# Altium PCB PCB2.PcbDoc
Units mm, origin at the board's own origin, x right, y up, seen from the top; angles counter-clockwise.
Board outline 35.51 x 41.3 mm, 2 copper layers (Top Layer, Bottom Layer); 16 components, 12 nets, 36 pads, 0 vias.
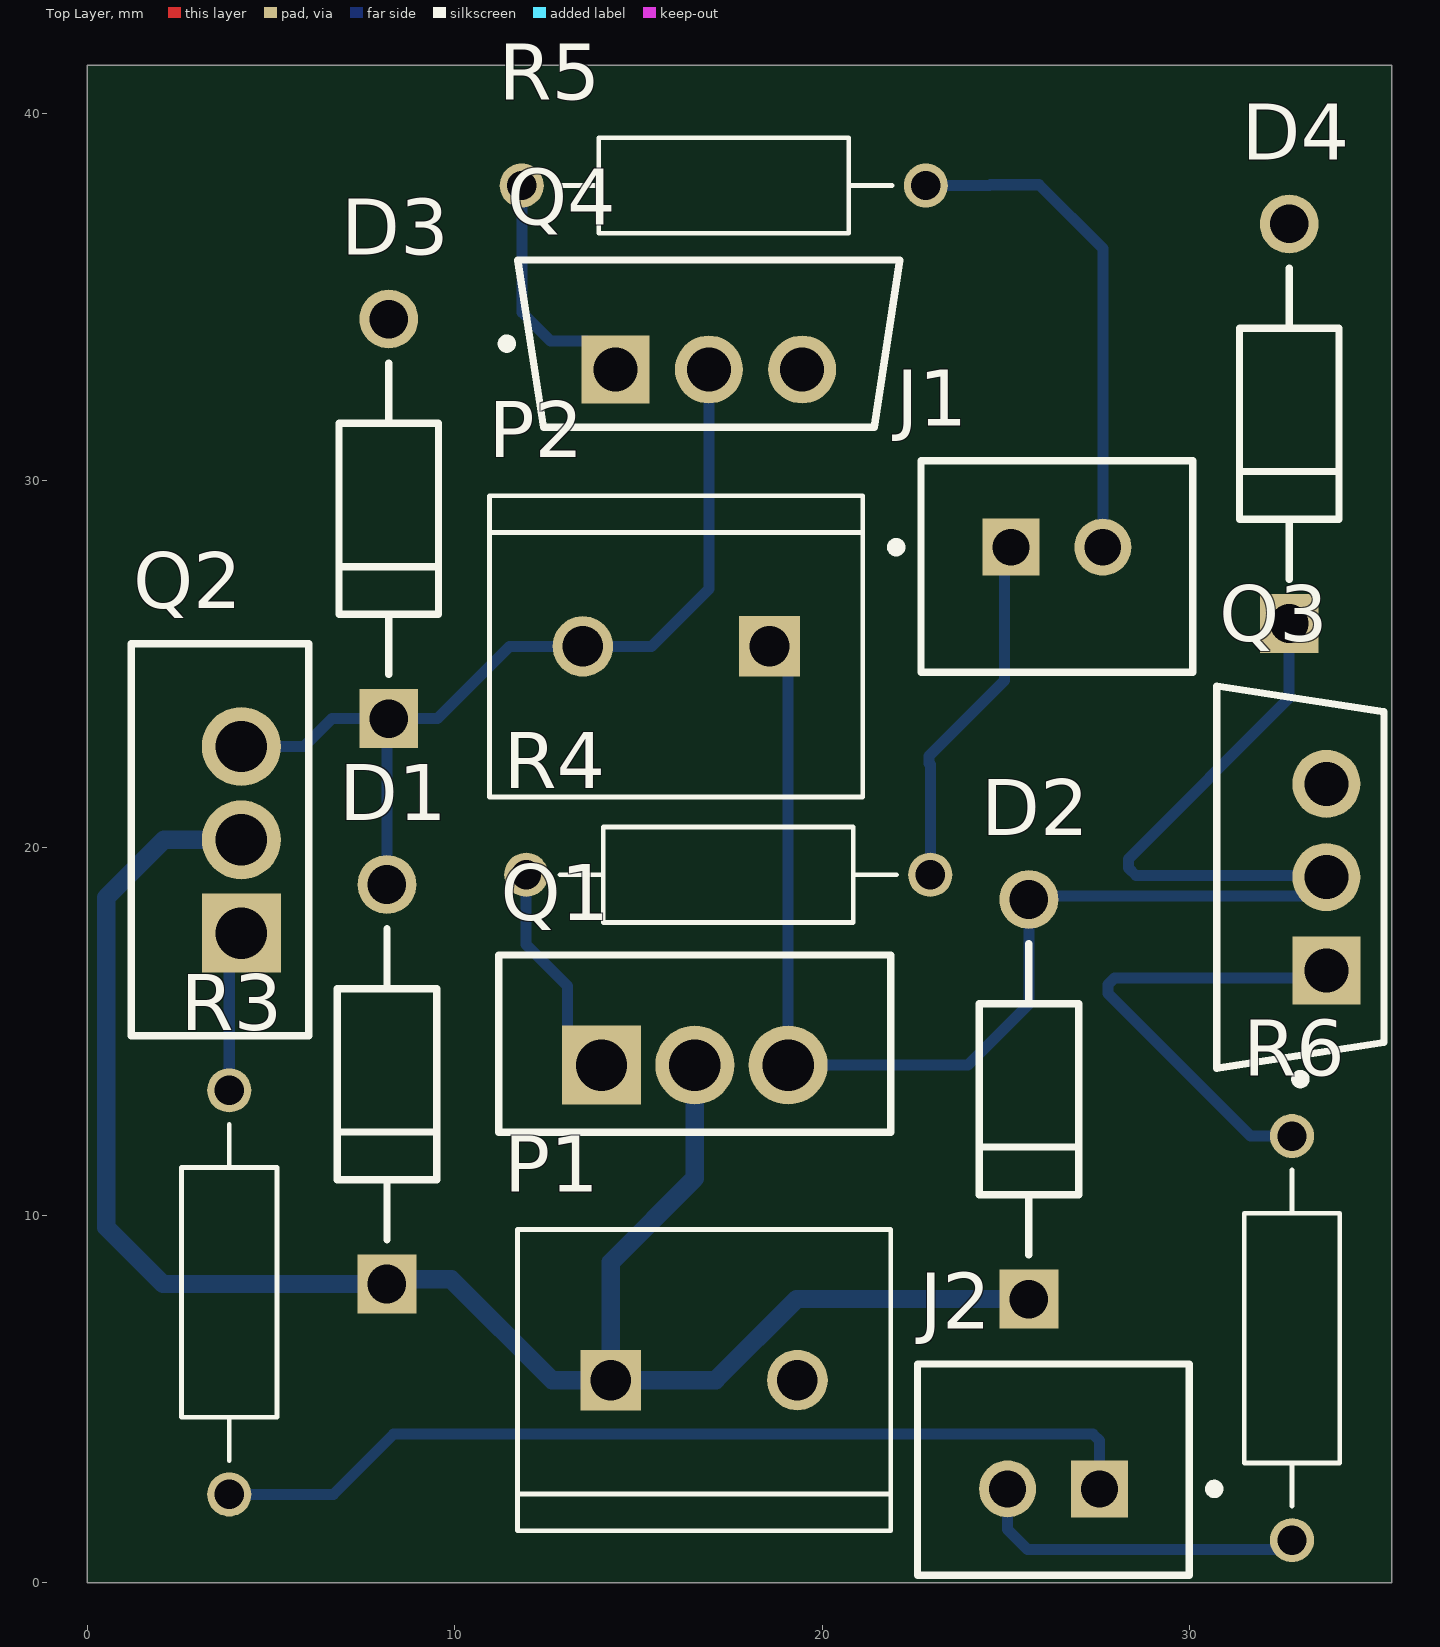
[diagram p0: Top Layer view]
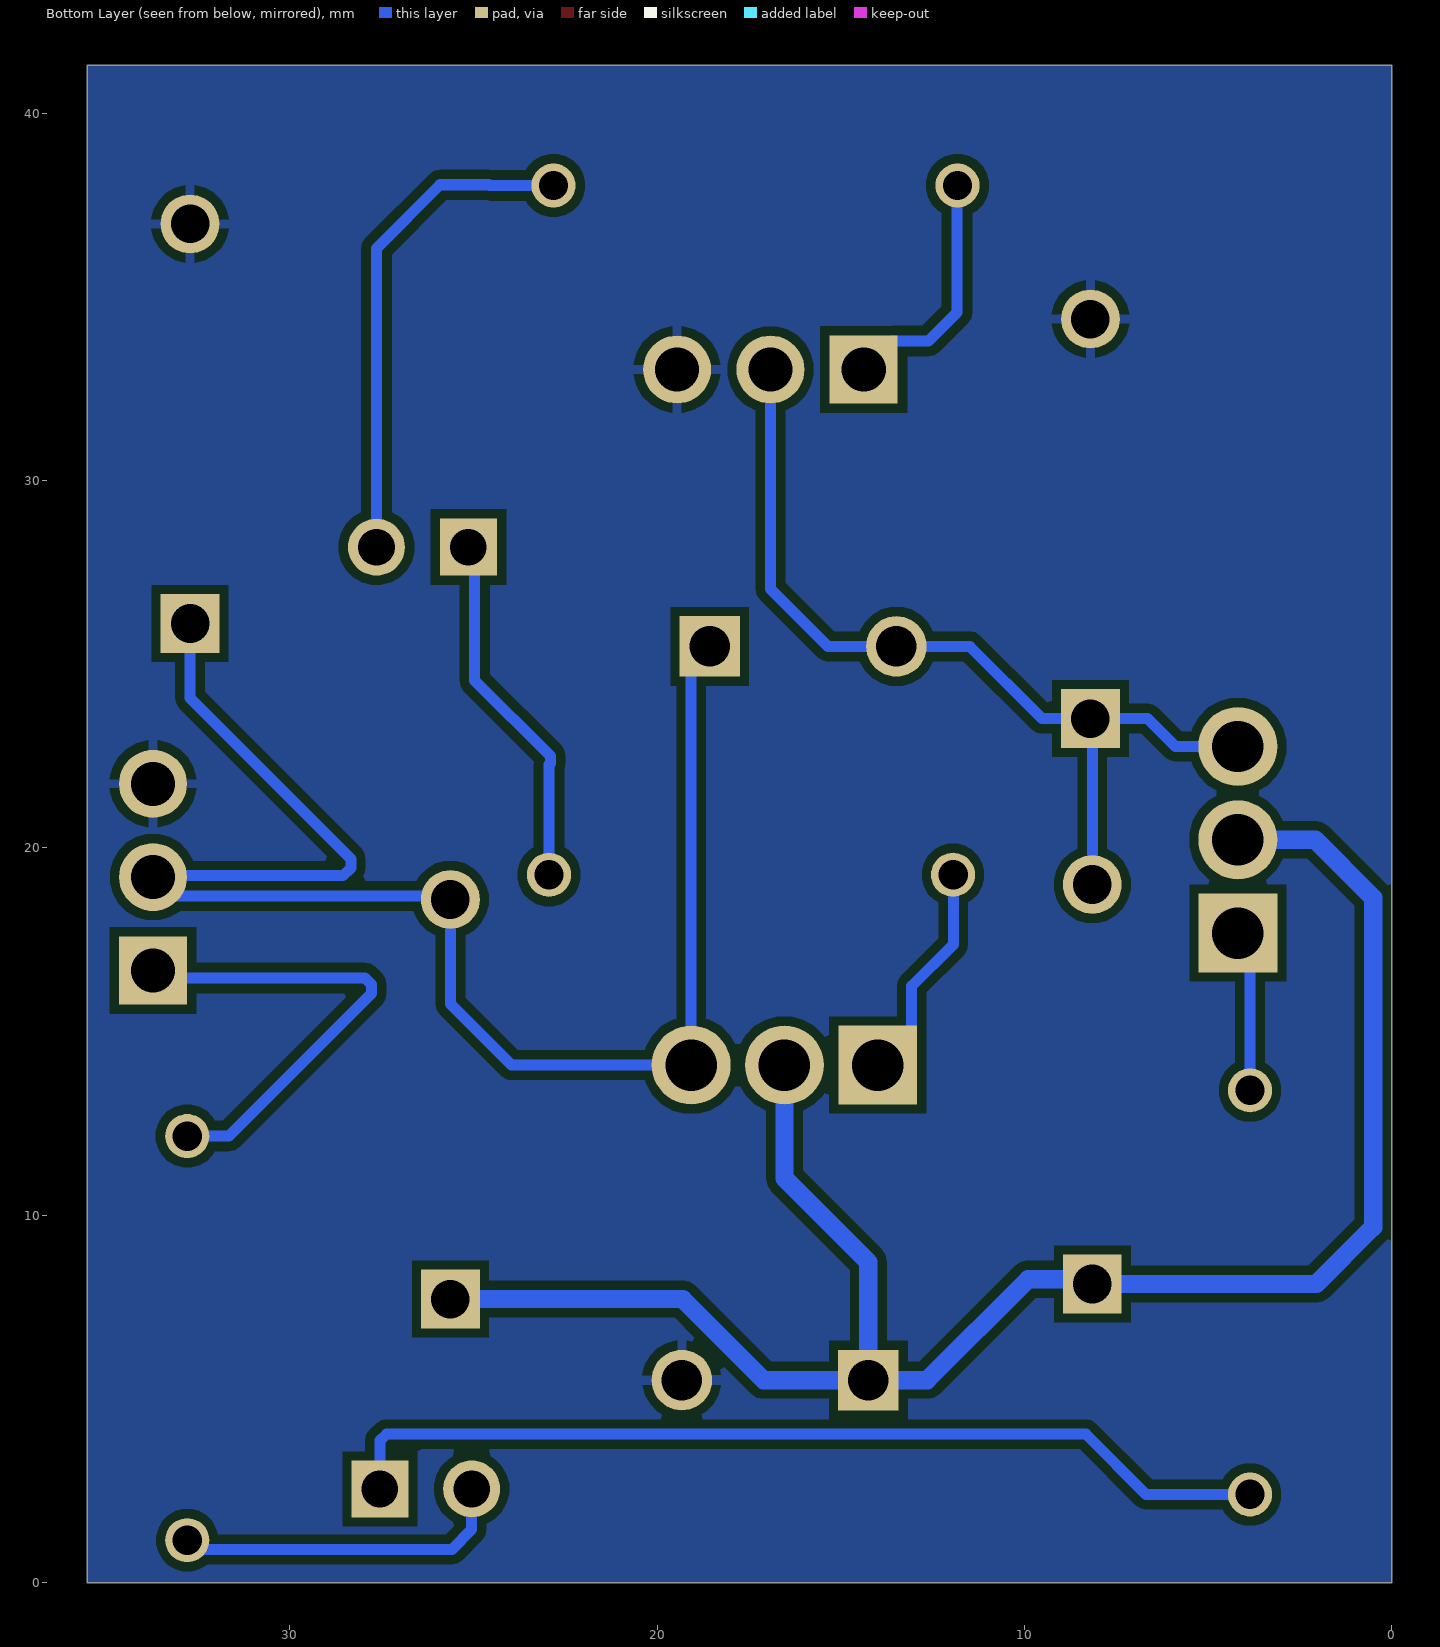
[diagram p1: Bottom Layer view, seen from below]
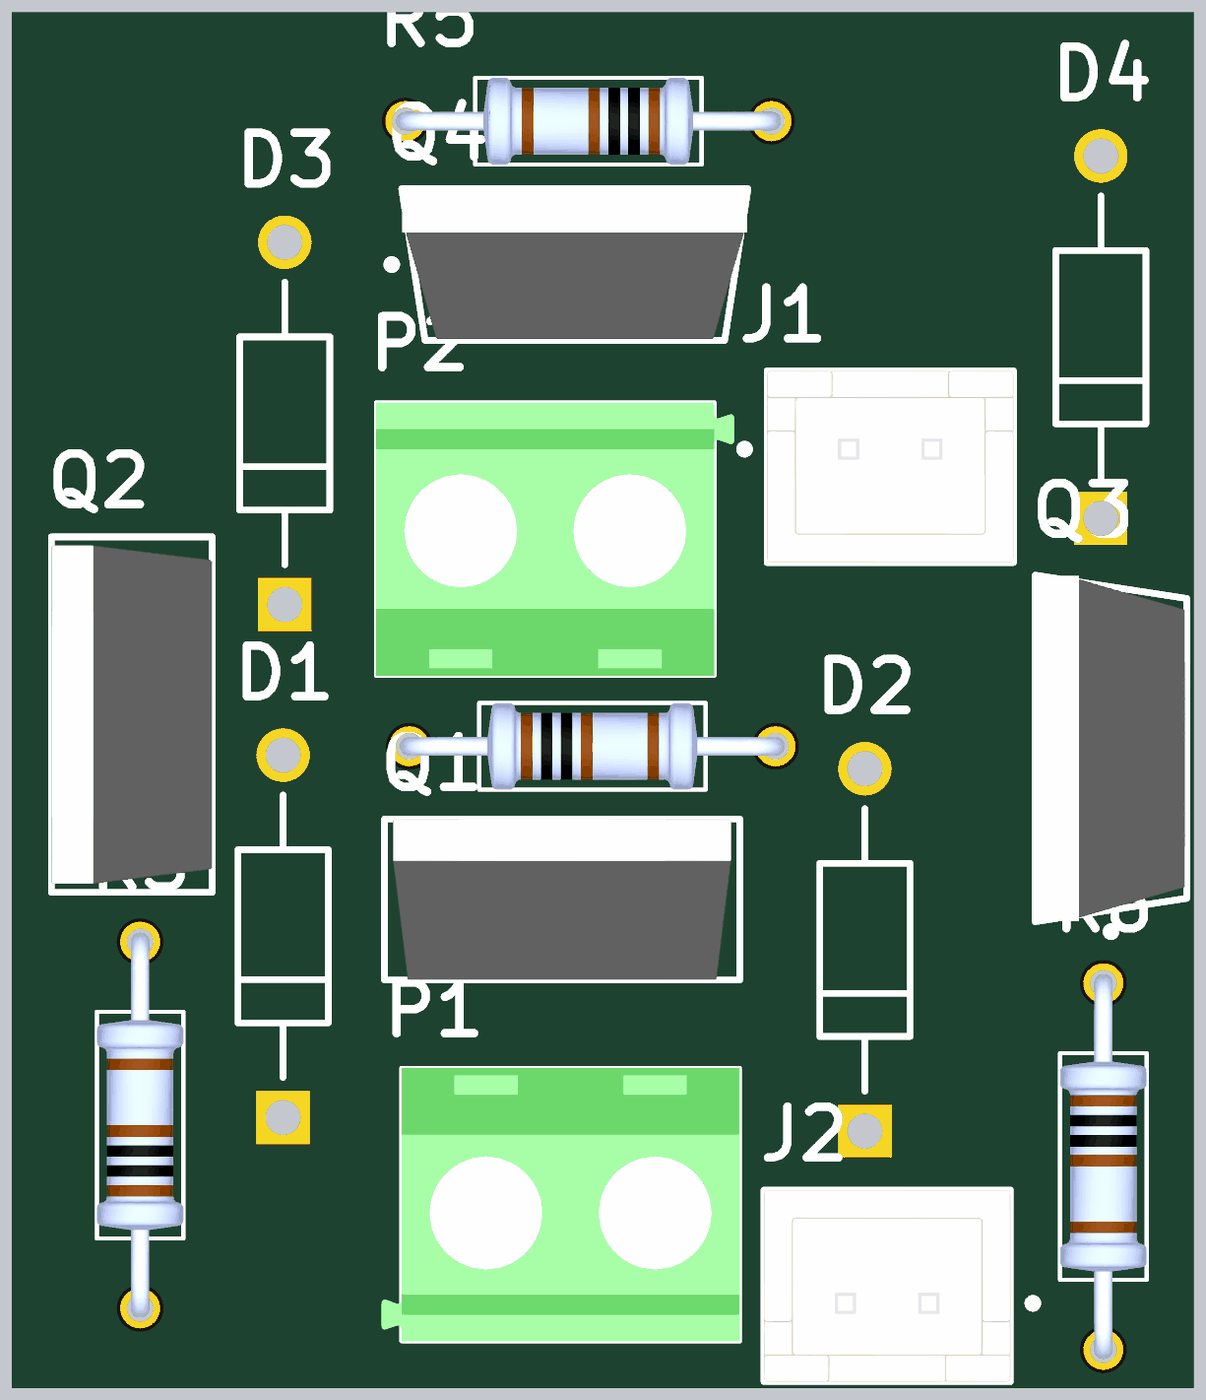
[diagram p2: 3D render of the assembled board from above, using the file's embedded part models]

## Layer stack, top to bottom
Top Solder: solder mask 0.0102, Solder Resist, Dk 3.5
Top Layer: signal copper 0.0356
Dielectric 1: dielectric 0.32, FR-4, Dk 4.8
Bottom Layer: signal copper 0.0356
Bottom Solder: solder mask 0.0102, Solder Resist, Dk 3.5

## Board outline
0,0 35.509,0 35.509,41.3 0,41.3

## Design rules (kind name [scope] priority, off if disabled: settings)
Clearance Clearance_1 [OnMid vs OnMid] p1: gap=0.254 ignorepadtopadclearanceinfootprint=FALSE except(0.127: SMDPad-SMDPad SMDPad-THPad; 0.5: Arc-SMDPad Arc-THPad Track-SMDPad Track-THPad SMDPad-Text THPad-Text) sourcerule=37 cellrowname=All cellrowtype=0 cellcolname=All cellcoltype=0 innerlayers=TRUE
Clearance Clearance_2 [(ExistsOnLayer('Top Layer') Or ExistsOnLayer('Bottom Layer')) vs (ExistsOnLayer('Top Layer') Or ExistsOnLayer('Bottom Layer'))] p2: gap=0.254 ignorepadtopadclearanceinfootprint=FALSE except(0.127: SMDPad-SMDPad SMDPad-THPad; 0.5: Arc-SMDPad Arc-THPad Track-SMDPad Track-THPad SMDPad-Text THPad-Text) sourcerule=37 cellrowname=All cellrowtype=0 cellcolname=All cellcoltype=0 outerlayers=TRUE
Clearance [All] p3: gap=0.254 ignorepadtopadclearanceinfootprint=FALSE ismatrix=TRUE
HoleSize MaxMinHoleSize_1 [All] p1: absolutevalues=TRUE maxlimit=6.3 minlimit=0.3 maxpercent=80.000 minpercent=20.000
PolygonConnect [All] p1: connectstyle=Relief reliefconductorwidth=0.254 reliefentries=4 polygonreliefangle="90 Angle" airgapwidth=0.254
RoutingVias [All] p1: holewidth=0.711 width=1.27 viastyle="Through Hole" minholewidth=0.711 minwidth=1.27 maxholewidth=0.711 maxwidth=1.27
SolderMaskExpansion [All] p1: expansion=0.102 istentingtop=FALSE
Width MaxMinWidth_1 [All] p1: maxlimit=0.5 minlimit=0.3 preferedwidth=0.3 minimp=50.000000 maximp=50.000000 favimp=50.000000
Width [All] p2: maxlimit=0.254 minlimit=0.254 preferedwidth=0.254
29 further rules are at their usual default settings.

## Components (designator, comment, footprint, x,y, rotation, side; value= is the part's Value field where it differs from the comment)
D1 "1N5817" FP-DO-41-MFG 8.153,13.565 r90 top
D2 "1N5817" FP-DO-41-MFG 25.629,13.156 r90 top
D3 "1N5817" FP-DO-41-MFG 8.204,28.958 r90 top
D4 "1N5817" FP-DO-41-MFG 32.715,31.547 r90 top
J1 "B2B-XH-A(LF)(SN)" FP-B2B-XH-A_LF_SN-MFG 26.391,27.661 r0 top
J2 "B2B-XH-A(LF)(SN)" FP-B2B-XH-A_LF_SN-MFG 26.298,3.075 r180 top
P1 "282837-2" TE_282837-2 16.789,5.512 r0 top
P2 "282837-2" TE_282837-2 16.027,25.486 r180 top
Q1 "IRF9540NLPBF" FP-PG-TO262-3-MFG 16.535,14.671 r90 top
Q2 "IRF9540NLPBF" FP-PG-TO262-3-MFG 3.608,20.22 r180 top
Q3 "IRLZ44NPbF" FP-PG-TO220-3-MFG 33.02,19.205 r180 top
Q4 "IRLZ44NPbF" FP-PG-TO220-3-MFG 16.916,33.727 r90 top
R3 "MFR-25FBF52-1K" RESAD1100W55L680D260 3.861,7.899 r90 top
R4 "MFR-25FBF52-1K" RESAD1100W55L680D260 17.444,19.268 r0 top
R5 "MFR-25FBF52-1K" RESAD1100W55L680D260 17.323,38.031 r180 top
R6 "MFR-25FBF52-1K" RESAD1100W55L680D260 32.791,6.655 r270 top

## Footprints (in the part's own frame and the unit in brackets; to place one, negate y for a bottom-side part, rotate by r counter-clockwise, add the part's x,y. Pads: shape width x height; smd on the part's side, far side on the other; paste and mask are expansions set on the pad)
FP-B2B-XH-A_LF_SN-MFG [mm]
  rect 1.55x1.55 hole 1 paste-2539.97 mask+0: 1(-1.25,0.525)
  round 1.55 hole 1 paste-2539.97 mask+0: 2(1.25,0.525)
  silkscreen extent -4.5,-2.88 3.7,2.88, body extent -3.8,-2.98 3.8,2.98, height 0.25
FP-DO-41-MFG [mm]
  rect 1.6x1.6 hole 1.05 paste-2539.97 mask+0: 1(-5.438,0)
  round 1.6 hole 1.05 paste-2539.97 mask+0: 2(5.438,0)
  silkscreen extent -4.24,-1.36 4.24,1.36
FP-PG-TO220-3-MFG [mm]
  rect 1.85x1.85 hole 1.2 paste-2539.97 mask+0: 1(-0.705,2.54)
  round 1.85 hole 1.2 paste-2539.97 mask+0: 2(-0.705,0) 3(-0.705,-2.54)
  silkscreen extent -2.27,-5.2 2.27,5.62, body extent -2.37,-5.55 2.37,5.55, height 0.25
FP-PG-TO262-3-MFG [mm]
  rect 2.15x2.15 hole 1.4 paste-2539.97 mask+0: 1(-0.583,2.54)
  round 2.15 hole 1.4 paste-2539.97 mask+0: 2(-0.583,0) 3(-0.583,-2.54)
  silkscreen extent -2.41,-5.34 2.41,5.34, body extent -2.51,-5.44 2.51,5.44, height 0.25
RESAD1100W55L680D260 [mm]
  round 1.2 hole 0.8: 1(-5.5,0) 2(5.5,0)
  silkscreen extent -4.58,-1.3 4.58,1.3, body extent -5.77,-1.3 5.77,1.3, height 2.6
TE_282837-2 [mm]
  rect 1.65x1.65 / inner round 1.65 / far side rect 1.65x1.65 hole 1.1: 1(-2.54,0)
  round 1.65 hole 1.1: 2(2.54,0)
  silkscreen extent -5.08,-4.1 5.08,4.1, body extent -5.68,-4.1 5.08,4.1, height 10

## Part data
D1 D2 D3 D4: library part CMP-12187-000037-1, "DIODE SCHOTTKY 20V 1A DO41", Average Rectified Current=1A, Capacitance=110pF, Case/Package=DO-41, Forward Voltage=450mV, Max Forward Surge Current (Ifsm)=25A, Max Operating Temperature=150°C, Max Repetitive Reverse Voltage (Vrrm)=20V, Max Reverse Current=500uA, Min Operating Temperature=-65°C, Package Quantity=2000, Current Rating=1A, Element Configuration=Single, Forward Current=1A, Height=2.7mm, Lead Free="Lead Free", Length=5.2mm, Max Reverse Leakage Current=500uA, Max Reverse Voltage (DC)=20V, Max Surge Current=25A, Mount="Through Hole", Number of Pins=2, Output Current=1A, Packaging="Cut Tape", Peak Non-Repetitive Surge Current=25A, Polarity=Standard, Radiation Hardening=No, REACH SVHC="No SVHC", RoHS Compliant=Yes, Series=-, Voltage Rating (DC)=20V, Weight=0.01lb, Width=2.7mm
J1 J2: library part CMP-2000-05888-3, "CONN HEADER VERT 2POS 2.5MM", Color=Natural, Contact Resistance=20mR, Current Rating=3A, Housing Color=White, Insulation Resistance=1GR, Max Operating Temperature=85°C, Max Voltage Rating (AC)=250V, Min Operating Temperature=-25°C, Connector Type="Male Pin", Contact Material=Brass, Contact Plating=Tin, Contact Type="Male Pin", Depth=5.75mm, Fastening Type=Detent, Housing Material=Polyamide, Lead Free="Lead Free", Lead Pitch=2.5mm, Length=7.4mm, Max Current Rating=3A, Max Voltage Rating (DC)=250V, Mount="Through Hole", Number of Contacts=2, Number of Positions=2, Number of Rows=1, Orientation=Straight, Packaging=Bulk, Pitch=2.5mm, REACH SVHC="No SVHC", Series=XH, Termination=Solder, Voltage Rating=250V, Voltage Rating (AC)=250V, Wire/Cable Gauge=22AWG
P1 P2: "Ð Ð°Ð·ÑŠÐµÐ¼Ð½Ñ‹Ðµ ÐºÐ»ÐµÐ¼Ð¼Ð½Ñ‹Ðµ ÐºÐ¾Ð»Ð¾Ð´ÐºÐ¸ Ð Ð¾Ð·ÐµÑ‚ÐºÐ° 2 Ð¿Ð¾Ð»Ð¾Ð¶ÐµÐ½Ð¸Ñ 5,08 Ð¼Ð¼ ÐŸÑ€Ð¸Ð¿Ð¾Ð¹ Ð¿Ñ€ÑÐ¼Ð¾Ð¹ Ñ‡ÐµÑ€ÐµÐ· Ð¾Ñ‚Ð²ÐµÑ€ÑÑ‚Ð¸Ðµ 13,5 Ð / ÐºÐ¾Ð½Ñ‚Ð°ÐºÑ‚", Package=None, Availability="In Stock", Check_prices=https://www.snapeda.com/parts/282837-2/TE+Connectivity+AMP+Connectors/view-part/?ref=eda, MF="TE Connectivity", MP=282837-2, Price=None, Purchase-URL=https://pricing.snapeda.com/search/part/282837-2/?ref=eda, SnapEDA_Link=https://www.snapeda.com/parts/282837-2/TE+Connectivity+AMP+Connectors/view-part/?ref=snap
Q1 Q2: library part CMP-32901-000518-1, "MOSFET P-CH 100V 23A TO262-3", Case/Package=TO-262, Continuous Drain Current (ID)=23A, Drain to Source Resistance=117mR, Drain to Source Voltage (Vdss)=-100V, Gate to Source Voltage (Vgs)=20V, Input Capacitance=1.45nF, Max Operating Temperature=150°C, Max Power Dissipation=3.1W, Min Operating Temperature=-55°C, Power Dissipation=110W, Threshold Voltage=4V, Halogen Free="Not Halogen Free", Height=0.38inch, Lead Free="Contains Lead", Length=0.42inch, Max Dual Supply Voltage=-100V, Mount="Through Hole", Number of Channels=1, Number of Pins=3, Packaging=Rail/Tube, Rds On Max=117mR, REACH SVHC="No SVHC", Rise Time=67ns, RoHS Compliant=Yes, Turn-Off Delay Time=40ns, Turn-On Delay Time=13ns, Width=0.19inch
Q3 Q4: library part CMP-32901-000488-1, "MOSFET N-CH 55V 47A TO220AB", Case/Package=TO-220, Continuous Drain Current (ID)=47A, Drain to Source Breakdown Voltage=55V, Drain to Source Resistance=35mR, Gate to Source Voltage (Vgs)=16V, Input Capacitance=1.7nF, Max Operating Temperature=175°C, Max Power Dissipation=110W, Min Operating Temperature=-55°C, Threshold Voltage=2V, Drain to Source Voltage (Vdss)=55V, Element Configuration=Single, Halogen Free="Halogen Free", Height=0.6inch, Lead Free="Lead Free", Length=0.414inch, Max Dual Supply Voltage=55V, Mount="Through Hole", Number of Pins=3, Packaging=Rail/Tube, Power Dissipation=110W, Rds On Max=22mR, REACH SVHC="No SVHC", RoHS Compliant=Yes, Turn-Off Delay Time=26ns, Turn-On Delay Time=11ns, Width=0.185inch
R3 R4 R5 R6: library part MFR-25FBF52-10K, "10.2 kOhms Â±1% 0.25W, 1/4W Through Hole Resistor Axial - Metal Film", Package="Axial Yageo", Availability="In Stock", Check_prices=https://www.snapeda.com/parts/MFR-25FBF52-10K/Yageo/view-part/?ref=eda, MF=Yageo, MP=MFR-25FBF52-10K, Price=None, Purchase-URL=https://pricing.snapeda.com/search/part/MFR-25FBF52-10K/?ref=eda, SnapEDA_Link=https://www.snapeda.com/parts/MFR-25FBF52-10K/Yageo/view-part/?ref=snap

## Nets (pads, with @x,y where several pads share a name; then routed paths per layer and width w, separated by ;. In a path a pad name is that pad's centre, name@x,y a point inside that pad or via, vN(x,y) a via of type N, cw(c..) or ccw(c..) an arc to the next point about the centre after c; other vN are vias at no path point)
+12: D1.1 D2.1 P1.1 Q1.2 Q2.2 | length 50.7
  Bottom Layer w0.5: Q2.2 2.084,20.22 0.508,18.644 0.508,9.677 2.058,8.127 D1.1 8.281,8.255 9.906,8.255 12.649,5.512 P1.1 ; Q1.2 16.535,11.007 14.249,8.721 P1.1 ; D2.1 19.308,7.718 17.101,5.512 P1.1
GND: D3.2 D4.2 P1.2 Q3.3 Q4.3
"MCU1 Ground": J2.2 R6.2 | length 9.1
  Bottom Layer w0.3: J2.2 25.048,1.444 25.59,0.902 R6.2@32.817,0.902
"MCU1 Signal": J2.1 R3.1 | length 25.8
  Bottom Layer w0.3: R3.1 6.692,2.399 8.331,4.039 27.372,4.039 27.548,3.863 J2.1
"MCU2 Ground": J1.2 R5.1 | length 13.8
  Bottom Layer w0.3: R5.1@22.758,37.966 R5.1 24.561,38.031 24.582,38.052 25.905,38.052 27.641,36.317 J1.2
"MCU2 Signal": J1.1 R4.2 | length 9.9
  Bottom Layer w0.3: R4.2 22.944,22.268 22.908,22.304 22.908,22.502 24.968,24.562 24.968,28.013 J1.1
NetD1_2: D1.2 D3.1 P2.2 Q2.3 Q4.2 | length 25
  Bottom Layer w0.3: Q2.3 5.894,22.76 6.654,23.52 D3.1 ; D1.2 8.153,23.469 D3.1 ; Q4.2 16.916,27.051 15.351,25.486 P2.2 11.49,25.486 9.524,23.52 D3.1
NetD2_2: D2.2 D4.1 P2.1 Q1.3 Q3.2 | length 43.3
  Bottom Layer w0.3: P2.1 19.075,24.978 Q1.3 23.969,14.088 25.629,15.748 D2.2 25.722,18.688 33.104,18.688 Q3.2@33.198,18.782 ; D4.1 32.715,24.079 28.339,19.703 28.339,19.454 28.551,19.242 33.687,19.242 Q3.2
NetQ1_1: Q1.1 R4.1 | length 6
  Bottom Layer w0.3: R4.1 11.938,19.262 11.938,17.374 13.07,16.242 13.07,15.013 Q1.1
NetQ2_1: Q2.1 R3.2 | length 4.4
  Bottom Layer w0.3: R3.2 3.861,17.35 Q2.1
NetQ3_1: Q3.1 R6.1 | length 13.1
  Bottom Layer w0.3: R6.1@32.879,12.243 R6.1 31.66,12.155 27.78,16.035 27.78,16.283 27.956,16.459 33.52,16.459 Q3.1
NetQ4_1: Q4.1 R5.2 | length 6.6
  Bottom Layer w0.3: R5.2 11.836,38.017 11.836,34.569 12.609,33.797 13.601,33.797 Q4.1

## Polygon pours and split planes (outlines as drawn)
GND on Bottom Layer "GND_L02_P000" (solid, remove dead copper, pour order 0): 0,41.3 35.509,41.3 35.509,0 0,0

## Silkscreen, mask and mechanical layers (free items; w line width, h text height)
Bottom Assembly:
  the board outline again, w0.1